# Altium PCB DC2342A-4-LAYOUT-ASCII.PcbDoc (part 2 of 2)
Units mm, origin at the board's own origin, x right, y up, seen from the top; angles counter-clockwise.
Board outline 88.9 x 88.9 mm, 4 copper layers (Comp Side, Layer 2, Layer 3, Solder Side), stack 0.831 mm thick; 86 components, 36 nets, 203 pads, 245 vias.
Unrouted connection lines stored in the file: 89.
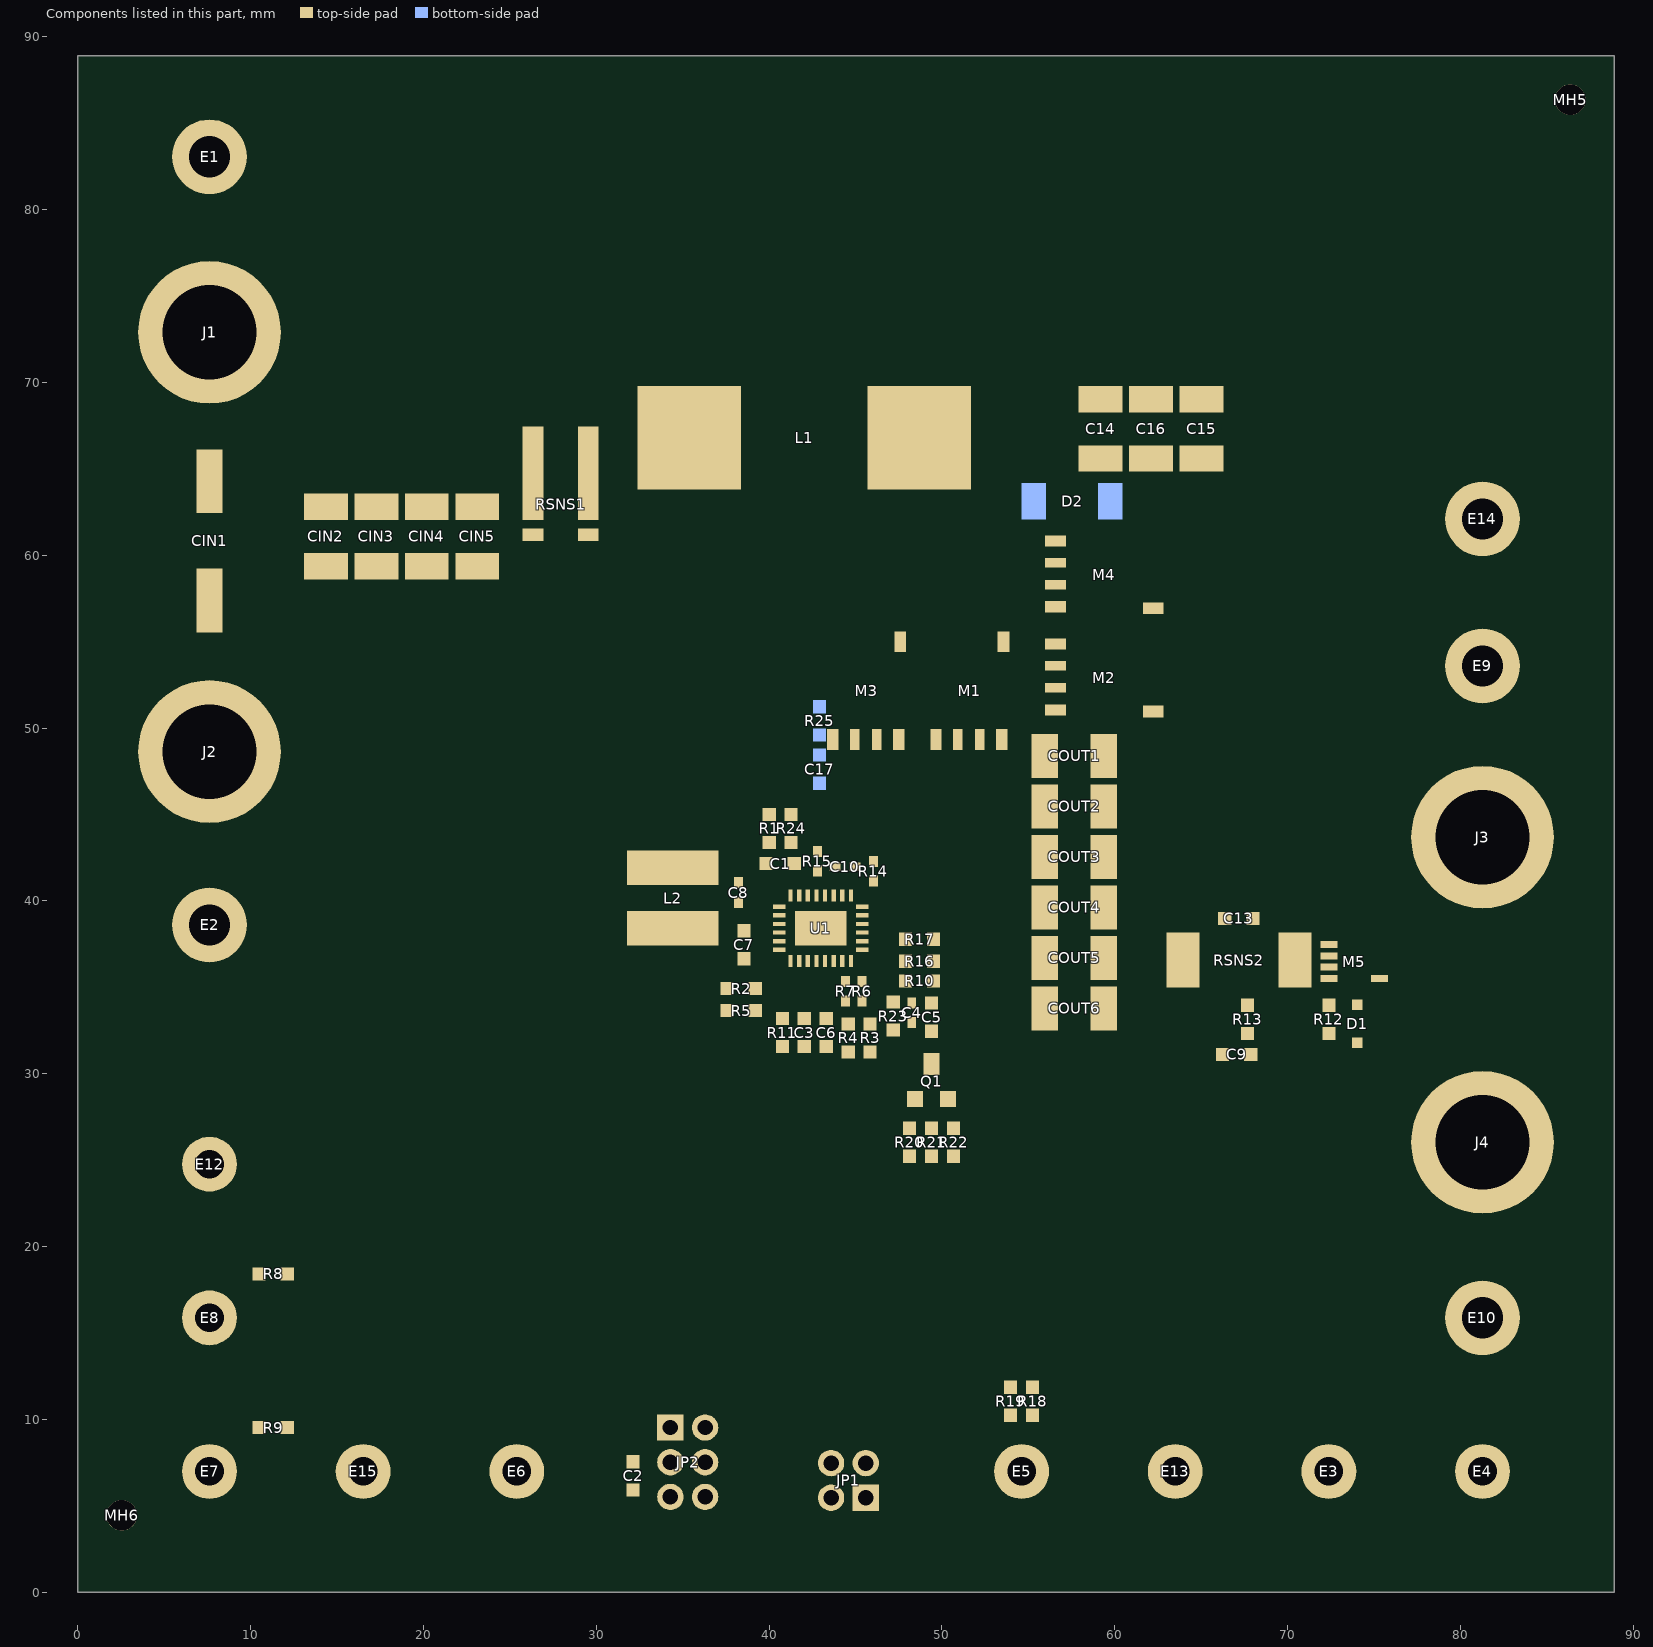
[diagram p4: the components of this part, seen from the top]

## Via types
v1: diameter 0.61, hole 0.254, Comp Side to Solder Side, 192 vias
v2: diameter 0.305, hole 0.152, Comp Side to Solder Side, 53 vias

## Nets (pads, with @x,y where several pads share a name; then routed paths per layer and width w, separated by ;. In a path a pad name is that pad's centre, name@x,y a point inside that pad or via, vN(x,y) a via of type N, cw(c..) or ccw(c..) an arc to the next point about the centre after c; other vN are vias at no path point) (continued)
copper on no net: | length 70.8
  Comp Side w0.127: 65.405,6.985 ccw(c63.5,6.985) 65.405,6.985
  Layer 3 w0.127: 32.58,5.08 ccw(c32.131,5.08) 32.58,5.08 ; 37.999,33.02 ccw(c37.592,33.02) 37.999,33.02 ; 42.444,30.988 ccw(c42.037,30.988) 42.444,30.988 ; 43.714,30.988 ccw(c43.307,30.988) 43.714,30.988 ; 49.175,32.956 ccw(c48.768,32.956) 49.175,32.956 ; 54.382,12.446 ccw(c53.975,12.446) 54.382,12.446 ; 65.434,6.985 ccw(c63.5,6.985) 65.434,6.985
  Solder Side w0.127: 32.557,5.08 ccw(c32.131,5.08) 32.557,5.08 ; 32.589,5.08 ccw(c32.131,5.08) 32.589,5.08 ; 38.018,33.02 ccw(c37.592,33.02) 38.018,33.02 ; 42.463,30.988 ccw(c42.037,30.988) 42.463,30.988 ; 43.733,30.988 ccw(c43.307,30.988) 43.733,30.988 ; 49.194,32.956 ccw(c48.768,32.956) 49.194,32.956 ; 54.401,12.446 ccw(c53.975,12.446) 54.401,12.446 ; 65.434,6.985 ccw(c63.5,6.985) 65.434,6.985

## Polygon pours and split planes (outlines as drawn)
N17513992 on Solder Side (solid, remove dead copper, pour order 71): 68.58,10.795 76.2,10.795 76.2,3.175 68.58,3.175
N17545932 on Solder Side (solid, remove dead copper, pour order 66): 42.291,66.675 57.658,66.675 57.658,50.292 42.291,50.292
EN/UVLO on Solder Side (solid, remove dead copper, pour order 61): 3.81,28.575 11.43,28.575 11.43,21.082 3.81,21.082
N17524747 on Solder Side (solid, remove dead copper, pour order 48): 3.81,19.685 11.43,19.685 11.43,12.065 3.81,12.065
PVIN on Solder Side (solid, remove dead copper, pour order 43): 27.813,60.96 1.27,60.96 1.27,87.63 27.813,87.63
N17541944 on Solder Side (solid, remove dead copper, pour order 38): 39.37,60.96 28.067,60.96 28.067,77.724 39.37,77.724
OUT on Solder Side (solid, remove dead copper, pour order 31): 57.912,50.292 72.898,50.292 72.898,66.675 57.912,66.675
N17516446 on Solder Side (solid, remove dead copper, pour order 30): 50.8,10.795 58.42,10.795 58.42,3.175 50.8,3.175
N17526210 on Solder Side (solid, remove dead copper, pour order 19): 3.81,10.795 11.43,10.795 11.43,3.175 3.81,3.175
N17514220 on Solder Side (solid, remove dead copper, pour order 17): 77.47,10.795 85.09,10.795 85.09,3.175 77.47,3.175
GND on Solder Side (solid, remove dead copper, pour order 10): 87.63,87.63 1.27,87.63 1.27,1.27 87.63,1.27
N17517750 on Solder Side (solid, remove dead copper, pour order 8): 21.59,10.795 29.21,10.795 29.21,3.175 21.59,3.175
N17821194 on Solder Side (solid, remove dead copper, pour order 0): 42.291,50.038 43.561,50.038 43.561,48.006 42.291,48.006
N17802509 on Comp Side (solid, remove dead copper, pour order 73): 25.527,61.658 27.813,61.658 27.813,60.833 25.527,60.833
N17513992 on Comp Side (solid, remove dead copper, pour order 72): 68.58,10.795 76.2,10.795 76.2,3.175 68.58,3.175
GND on Comp Side (solid, remove dead copper, pour order 70): 1.27,1.27 87.63,1.27 87.63,87.63 1.27,87.63
N17553131 on Comp Side (solid, remove dead copper, pour order 69): 45.657,43.561 46.482,43.561 46.482,41.974 45.657,41.974
N17514220 on Comp Side (solid, remove dead copper, pour order 68): 45.021,34.925 45.021,35.877 45.783,35.877 45.783,34.925
N17551482 on Comp Side (solid, remove dead copper, pour order 67): 43.37,42.291 44.291,42.291 44.291,41.021 43.37,41.021
PVIN on Comp Side (solid, remove dead copper, pour order 65): 41.974,40.767 41.783,40.767 40.703,41.846 40.703,43.434 41.084,43.815 41.974,43.815
N17573845 on Comp Side (solid, remove dead copper, pour order 64): 71.882,32.715 72.898,32.715 72.898,31.496 71.882,31.496
N17555485 on Comp Side (solid, remove dead copper, pour order 63): 50.038,29.845 50.038,31.623 48.768,31.623 48.768,29.845
N17513891 on Comp Side (solid, remove dead copper, pour order 62): 44.101,34.608 44.101,33.814 45.783,33.814 45.783,34.608
N17514220 on Comp Side (solid, remove dead copper, pour order 60): 77.47,10.795 85.09,10.795 85.09,3.175 77.47,3.175
PVIN on Comp Side (solid, remove dead copper, pour order 59): 46.291,31.813 45.371,31.813 45.371,30.543 46.291,30.543
N17545932 on Comp Side (solid, remove dead copper, pour order 58): 42.037,77.724 57.404,77.724 57.404,50.292 42.291,50.292 42.037,50.546
N17545932 on Comp Side (solid, remove dead copper, pour order 57): 44.514,43.561 45.402,43.561 45.402,41.021 44.514,41.021
N17514220 on Comp Side (solid, remove dead copper, pour order 56): 46.545,33.591 46.545,34.227 45.339,35.433 45.783,35.877 47.053,34.608 47.688,34.608 47.688,33.591
N17582960 on Comp Side (solid, remove dead copper, pour order 55): 37.968,39.543 37.968,40.027 39.955,40.027 40.32,39.662 40.32,39.543
N17573845 on Comp Side (solid, remove dead copper, pour order 54): 71.882,35.687 72.898,35.687 72.898,33.579 71.882,33.579
OUT on Comp Side (solid, remove dead copper, pour order 53): 48.863,36.989 50.228,36.989 50.228,36.005 48.863,36.005
PVIN on Comp Side (solid, remove dead copper, pour order 52): 38.735,45.466 38.735,44.577 40.45,44.577 40.45,45.466
PVIN on Comp Side (solid, remove dead copper, pour order 51): 41.846,43.815 39.56,43.815 39.56,42.926 41.846,42.926
N17570801 on Comp Side (solid, remove dead copper, pour order 50): 47.117,49.987 48.26,49.987 48.26,48.641 47.117,48.641
EN/UVLO on Comp Side (solid, remove dead copper, pour order 49): 38.672,33.084 38.672,35.496 39.688,35.496 39.688,33.084
OUT on Comp Side (solid, remove dead copper, pour order 47): 51.562,24.765 51.562,25.876 48.927,25.876 48.927,24.765
N17553131 on Comp Side (solid, remove dead copper, pour order 46): 55.899,50.292 55.899,51.435 57.245,51.435 57.245,50.292
PVIN on Comp Side (solid, remove dead copper, pour order 45): 48.609,24.765 48.609,25.876 47.117,25.876 47.117,24.765
N17581235 on Comp Side (solid, remove dead copper, pour order 44): 31.559,40.164 31.559,37.148 37.02,37.148 37.592,37.719 37.592,40.164
N17581448 on Comp Side (solid, remove dead copper, pour order 42): 37.084,43.18 31.559,43.18 31.559,40.322 40.291,40.322 40.529,40.084 41.402,40.084 41.402,40.64 40.608,41.434 37.529,41.434 37.529,42.735
INTVCC on Comp Side (solid, remove dead copper, pour order 41): 54.737,12.7 55.753,12.7 55.753,11.303 54.737,11.303
N176855280 on Comp Side (solid, remove dead copper, pour order 40): 49.53,29.019 51.149,29.019 51.149,26.194 50.197,26.194 50.197,27.94 49.53,27.94
N17516446 on Comp Side (solid, remove dead copper, pour order 37): 50.8,10.795 58.42,10.795 58.42,3.175 50.8,3.175
INTVCC on Comp Side (solid, remove dead copper, pour order 36): 39.497,38.746 37.823,38.746 37.823,37.784 39.497,37.784
N17575671 on Comp Side (solid, remove dead copper, pour order 35): 73.279,57.658 87.63,57.658 87.63,32.893 73.279,32.893
N17553131 on Comp Side (solid, remove dead copper, pour order 34): 55.899,56.261 55.899,57.404 57.245,57.404 57.245,56.261
N17513992 on Comp Side (solid, remove dead copper, pour order 33): 44.101,33.496 44.101,32.226 46.323,32.226 46.323,33.496
N17541944 on Comp Side (solid, remove dead copper, pour order 32): 28.067,77.724 41.783,77.724 41.783,56.515 30.734,56.515 30.734,61.912 28.067,61.912
N17530568 on Comp Side (solid, remove dead copper, pour order 29): 42.831,32.544 43.783,32.544 43.783,34.353 42.831,34.353
N17560526 on Comp Side (solid, remove dead copper, pour order 28): 67.31,39.751 73.025,39.751 73.025,35.941 71.628,35.941 71.628,34.671 67.31,34.671
EN/UVLO on Comp Side (solid, remove dead copper, pour order 27): 3.81,28.575 11.43,28.575 11.43,21.082 3.81,21.082
N17570801 on Comp Side (solid, remove dead copper, pour order 26): 52.768,49.987 53.848,49.987 53.848,48.641 52.768,48.641
OUT on Comp Side (solid, remove dead copper, pour order 25): 65.786,31.75 66.929,31.75 66.929,30.353 65.786,30.353
N17524747 on Comp Side (solid, remove dead copper, pour order 24): 3.81,19.685 11.43,19.685 11.43,12.065 3.81,12.065
PVIN on Comp Side (solid, remove dead copper, pour order 23): 1.27,60.833 25.273,60.833 25.273,61.912 27.813,61.912 27.813,77.978 57.658,77.978 57.658,67.437 66.802,67.437 66.802,87.63 1.27,87.63
PVIN on Comp Side (solid, remove dead copper, pour order 22): 36.703,35.401 38.227,35.401 38.227,34.48 36.703,34.48
N17802504 on Comp Side (solid, remove dead copper, pour order 21): 28.067,61.658 30.48,61.658 30.48,60.833 28.067,60.833
N178073360 on Comp Side (solid, remove dead copper, pour order 20): 48.959,35.877 48.959,33.591 50.102,33.591 50.102,35.877
INTVCC on Comp Side (solid, remove dead copper, pour order 18): 11.684,10.033 12.573,10.033 12.573,8.509 11.684,8.509
N17513992 on Comp Side (solid, remove dead copper, pour order 16): 44.101,34.925 44.101,35.877 44.767,35.877 44.767,34.925
N17517750 on Comp Side (solid, remove dead copper, pour order 15): 21.59,10.795 29.21,10.795 29.21,3.175 21.59,3.175
N17560526 on Comp Side (solid, remove dead copper, pour order 14): 67.31,32.766 68.326,32.766 68.326,30.353 67.31,30.353
N17786879 on Comp Side (solid, remove dead copper, pour order 13): 32.639,8.064 31.623,8.064 31.623,6.858 32.639,6.858
N17508735 on Comp Side (solid, remove dead copper, pour order 12): 40.291,32.544 41.243,32.544 41.243,34.353 40.291,34.353
SSFM on Comp Side (solid, remove dead copper, pour order 11): 41.561,32.544 42.513,32.544 42.513,34.353 41.561,34.353
N17528963 on Comp Side (solid, remove dead copper, pour order 9): 45.593,37.211 47.053,35.75 48.704,35.75 48.704,33.718 47.942,33.718 47.942,34.861 47.244,34.861 46.323,35.782 46.323,35.846 45.593,36.576
N17570801 on Comp Side (solid, remove dead copper, pour order 7): 42.418,43.561 44.196,43.561 44.196,42.672 43.18,42.672 43.18,42.481 42.418,42.481
INTVCC on Comp Side (solid, remove dead copper, pour order 6): 11.684,18.923 12.573,18.923 12.573,17.399 11.684,17.399
N17555485 on Comp Side (solid, remove dead copper, pour order 5): 47.561,38.1 48.273,38.1 48.273,36.068 47.276,36.068 47.276,36.02 45.91,37.386 45.91,37.782 47.561,37.782
OUT on Comp Side (solid, remove dead copper, pour order 4): 57.658,67.183 57.658,32.385 57.912,32.131 67.056,32.131 67.056,40.005 73.025,40.005 73.025,57.912 87.63,57.912 87.63,67.183
OUT on Comp Side (solid, remove dead copper, pour order 3): 40.831,45.466 40.831,44.45 42.545,44.45 42.545,45.466
N17687401 on Comp Side (solid, remove dead copper, pour order 2): 49.276,29.019 47.657,29.019 47.657,26.194 49.879,26.194 49.879,27.686 49.276,27.686
N17526210 on Comp Side (solid, remove dead copper, pour order 1): 3.81,10.795 11.43,10.795 11.43,3.175 3.81,3.175
GND on Layer 3 (solid, remove dead copper, pour order 39): 87.63,87.63 1.27,87.63 1.27,1.27 87.63,1.27
GND on Layer 2 (split plane): 87.565,12.319 72.771,12.319 46.609,38.481 44.958,38.481 44.958,38.354 46.482,38.354 72.644,12.192 87.565,12.192 87.565,1.335 1.335,1.335 1.335,30.988 33.401,30.988 40.894,38.481 40.894,38.608 40.767,38.608 33.337,31.178 1.335,31.178 1.335,87.565 87.565,87.565

## Keep-outs
Keep-Out Layer:
  the board outline again, w0.127

## Other copper
Comp Side:
  pour cut-out: 31.496,6.731 32.766,6.731 32.766,4.699 31.496,4.699 31.496,6.731
  pour cut-out: 42.545,8.636 46.736,8.636 46.736,4.445 42.545,4.445 42.545,8.636
  pour cut-out: 65.151,34.671 69.215,34.671 69.215,35.687 65.151,35.687 65.151,34.671
  pour cut-out: 68.199,33.591 68.199,35.687 66.421,35.687 66.421,32.258 66.929,32.258 66.929,33.591 68.199,33.591
  pour cut-out: 53.34,12.827 54.483,12.827 54.483,11.049 53.34,11.049 53.34,12.827
  pour cut-out: 41.212,37.592 41.656,37.592 41.656,37.148 41.212,37.148 41.212,37.592
  pour cut-out: 36.767,34.353 36.767,29.083 47.561,29.083 47.561,29.21 36.893,29.21 36.893,34.353 36.767,34.353
  pour cut-out: 45.783,39.306 51.371,39.306 51.371,28.003 51.244,28.003 51.244,39.179 45.783,39.179 45.783,39.306
  text "LAYER 1 - TOP LAYER" at 3.048,-5.334 h1.27
Layer 3:
  pour cut-out: 42.545,8.636 46.736,8.636 46.736,4.445 42.545,4.445 42.545,8.636
  text "LAYER 3 - GND PLANE 2" at 3.048,-5.334 h1.27
Solder Side:
  pour cut-out: 42.545,8.509 46.736,8.509 46.736,4.318 42.545,4.318 42.545,8.509
  text "REV 4" at 20.574,85.979 h1.14
  text "LAYER 4 - BOTTOM LAYER" at 3.048,-5.334 h1.27
Layer 2 (plane layer: these items are gaps in the copper):
  region: 88.9,0 0,0 0,88.9 88.9,88.9 hole: 87.63,87.63 1.27,87.63 1.27,1.27 87.63,1.27
  pour cut-out: 0.127,31.178 33.337,31.178 40.767,38.608 40.894,38.608 40.894,38.481 33.401,30.988 0.127,30.988 0.127,31.178
  pour cut-out: 44.958,38.481 46.609,38.481 46.609,38.354 44.958,38.354 44.958,38.481
  pour cut-out: 88.646,12.319 72.771,12.319 46.609,38.481 46.355,38.481 72.644,12.192 88.646,12.192 88.646,12.319
  lines w0.127: 1.27,1.27 87.63,1.27 87.63,87.63 1.27,87.63 1.27,1.27
  text "LAYER 2 - GND PLANE 1" at 3.048,-5.334 h1.27

## Silkscreen, mask and mechanical layers (free items; w line width, h text height)
SilkBottom:
  text "FOR CUSTOMER USE ONLY" at 52.88,86.03 h1.14
PMask Bottom:
  text "BOTTOM SOLDER PASTE" at 3.048,-5.334 h1.27
SMask Bottom:
  text "BOTTOM SOLDER MASK" at 3.048,-5.334 h1.27
Assembly Bottom:
  drawing of 31 lines, arcs and shapes, not listed
  text "1630 MCCARTHY BLVD" at -44.418,6.572 h0.89
  text "MILPITAS, CA 95035" at -44.418,4.794 h0.89
  text "PH: (408)432-1900" at -44.418,3.016 h0.89
  text "www.linear.com" at -44.418,1.238 h1.02
  text "LTC CONFIDENTIAL-" at -44.418,-0.54 h0.89
  text "TECHNOLOGY" at -23.462,-1.771 h1.84
  text "FOR CUSTOMER USE ONLY" at -44.418,-2.318 h0.89
  text "--------------------------------" at -4.127,-4 h1.4
  text "BOTTOM ASSEMBLY DRAWING" at -12.668,-5.747 h1.27
  text "TITLE:" at -5.683,-5.747 h1.27
  text "60V SYNCHRONOUS BOOST LED CONTROLLER" at -7.62,-11.684 h1.4
  text "REV" at -59.023,-17.812 h1.27
  text "IC NO." at -13.303,-17.812 h1.27
  text "SIZE" at -5.937,-17.812 h1.27
  text "LT3762EUFD" at -27.273,-18.606 h1.52
  text "BOTTOM COMPONENTS OPT" at 66.929,-19.05 h1.4
  text "4" at -60.928,-21.622 h1.65
  text "N/A" at -5.683,-21.622 h1.65
  text "DC2342A" at -29.495,-21.812 h1.52
  text "SHT 2 of 2" at -50.133,-25.432 h1.27
  text "DC2342A-4.PCB" at -18.542,-25.432 h1.27
  text "FILENAME:" at -5.683,-25.432 h1.27
Layer_14:
  drawing of 178 lines, arcs and shapes, not listed
  text "I" at -8.128,80.01 h1.27 r180
  text "IN" at -7.493,78.232 h0.89
  text "-" at -2.286,75.438 h1.59 r180
  text "+" at -12.065,73.66 h1.59
  text "A" at -6.731,72.072 h1.59
  text "V" at 95.758,66.421 h1.27
  text "OUT" at 97.028,66.421 h0.89
  text "+" at -22.987,66.04 h1.59 r180
  text "+" at -11.938,63.373 h1.59
  text "+" at 94.234,63.119 h1.59
  text "-" at 102.235,63.119 h1.59
  text "V" at 96.965,61.023 h1.59
  text "V" at -27.686,60.325 h1.27
  text "IN" at -26.416,60.325 h0.89
  text "V" at -22.225,59.944 h1.59
  text "-" at -12.065,57.15 h1.59
  text "-" at -24.384,56.388 h1.59
  text "I" at 95.885,50.673 h1.27 r180
  text "LED" at 96.52,48.895 h0.89
  text "-" at 101.727,46.101 h1.59 r180
  text "+" at 92.075,44.323 h1.59
  text "A" at 97.282,42.735 h1.59
  text "+" at 117.475,36.322 h1.59 r180
  text "OPTIONAL" at -15.113,32.512 h1.02
  text "10 LEDS" at 94.615,31.369 h1.02
  text "FOR SHUTDOWN" at -15.113,30.48 h1.02
  text "V" at 119.634,30.385 h1.27
  text "LED" at 121.158,30.385 h0.89
  text "V" at 115.443,30.131 h1.59
  text "2A" at 96.901,29.083 h1.02
  text "-" at 118.872,26.67 h1.59
  text "-" at -13.081,16.891 h1.59
  text "+" at -5.08,16.891 h1.59
  text "V" at -7.81,14.795 h1.59
  text "-" at -13.081,8.001 h1.59
  text "+" at -5.08,8.001 h1.59
  text "V" at -7.81,5.905 h1.59
  text "3V" at 53.086,-5.461 h1.02
  text "2V" at 77.216,-5.461 h1.02
  text "2V" at 90.043,-5.461 h1.02
  text "OPTIONAL FOR" at 32.195,-8.954 h1.02
  text "OPTIONAL FOR" at 2.413,-9.144 h1.02
  text "OPTIONAL FOR" at 94.234,-10.795 h1.02
  text "INTERNAL" at 32.195,-10.986 h1.02
  text "EXTERNAL" at 2.54,-11.049 h1.02
  text "0V" at 45.593,-12.827 h1.02
  text "0V" at 69.723,-12.827 h1.02
  text "0V" at 82.55,-12.827 h1.02
  text "ANALOG DIMMING" at 94.234,-12.827 h1.02
  text "PWM DIMMING" at 32.195,-13.018 h1.02
  text "PWM DIMMING" at 2.54,-13.081 h1.02
Layer_15:
  lines w1.27: 34.163,5.461 36.195,5.461 ; 43.561,7.493 45.593,7.493
Layer_18:
  text "TOP SILKSCREEN" at 3.048,-5.334 h1.27
Drill Drawing:
  drawing of 824 lines, arcs and shapes, not listed
  text "3.50\"" at -8.255,88.265 h1.27
  text "LAYER STRUCTURE" at 134.525,84.01 h2.16
  text ".0028\"" at 131.185,76.517 h1.27
  text "MICROSTRIP" at 168.116,76.517 h1.27
  text ".0035\"" at 131.185,72.707 h1.27
  text "PREPREG" at 168.116,72.707 h1.27
  text ".0014\"" at 131.185,68.897 h1.27
  text "STRIP LINE" at 168.116,68.897 h1.27
  text ".062\"" at 120.39,66.992 h1.27
  text "CORE MATERIAL" at 168.116,65.087 h1.27
  text "4 LAYERS" at 117.215,63.817 h1.27
  text ".0014\"" at 131.185,61.277 h1.27
  text "STRIP LINE" at 168.116,61.277 h1.27
  text ".0035\"" at 131.185,57.468 h1.27
  text "PREPREG" at 168.116,57.468 h1.27
  text ".0028\"" at 131.185,53.657 h1.27
  text "MICROSTRIP" at 168.116,53.657 h1.27
  text "NOTES: UNLESS OTHERWISE SPECIFIED" at 118.046,43.942 h2.16
  text "1. FAB PER IPC-A-600." at 118.681,38.227 h1.27
  text "2. MATERIAL: -EPOXY FIBERGLASS, NEMA GRADE FR-4" at 118.046,34.417 h1.27
  text "-FINISHED THICKNESS TO BE 0.062\" +/- .005\"" at 133.286,31.242 h1.27
  text "-TOTAL OF 4 LAYERS WITH 2 OZ. CU ON THE OUTER LAYERS" at 133.286,28.067 h1.27
  text "AND 1 OZ. CU ON THE INNER LAYERS." at 135.064,24.892 h1.27
  text "-FLAMMABILITY RATING: 94 V-O MINIMUM." at 133.286,21.717 h1.27
  text "3. SIZE: CUT TO DIMENSIONS AND TOLERANCES SHOWN." at 118.063,17.625 h1.27
  text "0.00\" ARE PRIMARY DATUMS." at 127.572,14.732 h1.27
  text "4. DRILLING: -DRILL HOLES PER SCHEDULE. PLATE THROUGH" at 118.063,10.259 h1.27
  text "HOLES WITH COPPER, 0.001\" THICK MIN." at 133.794,7.112 h1.27
  text "-ALL HOLE SIZES ARE SPECIFIED AFTER PLATING." at 132.27,3.937 h1.27
  text "-HOLE LOCATION TOLERANCES ARE +/-0.003\"" at 132.27,0.635 h1.27
  text "0.00\"" at -8.255,-0.635 h1.27
  text "IN RELATION TO CENTER" at 133.794,-2.159 h1.27
  text "0.00\"" at 0.635,-8.89 h1.27 r90
  text "3.50\"" at 89.535,-9.017 h1.27 r90
  text "5. FINISH: -SMOBC USING LPI BOTH SIDES, COLOR GLOSS GREEN." at 118.046,-10.668 h1.27
  text "-GOLD IMMERSION BOTH SIDES." at 129.794,-15.113 h1.27
  text "(LEAD FREE SOLDER CAN BE USED FOR PROTOTYPE)" at 131.572,-18.288 h1.27
  text "-FOR SILKSCREEN: BOTH SIDES USE WHITE NON-CONDUCTIVE INK." at 129.794,-21.336 h1.27
  text "6. DO NOT ALTER ARTWORK e.g. TO ADD LOGO OR DATE CODE." at 118.364,-25.4 h1.27
  text "PAD SIZE CAN BE MODIFIED TO MEET END FINISH." at 121.412,-28.448 h1.27
  text "7. PCBS ARE TO BE RoHS COMPLIANT." at 118.364,-32.258 h1.27
  text "8. SCORING FOR PANELIZED PCB:" at 118.364,-36.195 h1.27
  text ".020" at 153.316,-41.175 h1.27
  text "x" at 130.774,-44.985 h1.02
  text "x" at 131.726,-44.985 h1.02
  text "x" at 132.679,-44.985 h1.02
  text "x" at 133.631,-44.985 h1.02
  text "x" at 134.584,-44.985 h1.02
  text "x" at 135.536,-44.985 h1.02
  text "x" at 136.489,-44.985 h1.02
  text "x" at 137.441,-44.985 h1.02
  text "x" at 138.394,-44.985 h1.02
  text "x" at 139.346,-44.985 h1.02
  text "x" at 140.299,-44.985 h1.02
  text "x" at 141.251,-44.985 h1.02
  text "x" at 142.204,-44.985 h1.02
  text "x" at 143.156,-44.985 h1.02
  text "x" at 144.109,-44.985 h0.64
  text "x" at 130.774,-47.525 h1.02
  text "x" at 131.726,-47.525 h1.02
  text "x" at 132.679,-47.525 h1.02
  text "x" at 133.631,-47.525 h1.02
  text "x" at 134.584,-47.525 h1.02
  text "x" at 135.536,-47.525 h1.02
  text "x" at 136.489,-47.525 h1.02
  text "x" at 137.441,-47.525 h1.02
  text "x" at 138.394,-47.525 h1.02
  text "x" at 139.346,-47.525 h1.02
  text "x" at 140.299,-47.525 h1.02
  text "x" at 141.251,-47.525 h1.02
  text "x" at 142.204,-47.525 h1.02
  text "x" at 143.156,-47.525 h1.02
  text "x" at 144.109,-47.525 h0.64
  text ".017" at 129.504,-50.461 h1.27
  text "1630 MCCARTHY BLVD" at 187.928,-59.023 h0.89
  text "UNLESS OTHERWISE SPECIFIED" at 121.507,-59.531 h1.02
  text "MILPITAS, CA 95035" at 187.928,-60.801 h0.89
  text "ADDITIONAL REQUREMENT FOR PROTOTYPE FAB ONLY:" at -3.842,-61.468 h1.27
  text "PH: (408)432-1900" at 187.928,-62.579 h0.89
  text "DIMENSIONS ARE IN INCHES" at 122.015,-63.087 h1.02
  text "www.linear.com" at 187.928,-64.611 h1.14
  text "TOLERANCES:" at 122.015,-65.754 h1.02
  text "1. OUTGOING INSPECTION REPORT (BASED ON ACTUAL MEASUREMENTS AND CROSS SECTION)." at -2.572,-65.913 h1.27
  text "LTC CONFIDENTIAL-" at 187.928,-66.389 h0.89
  text "TECHNOLOGY" at 167.037,-67.215 h1.84
  text "+" at 134.969,-67.659 h0.76
  text "FOR CUSTOMER USE ONLY" at 187.928,-68.167 h0.89
  text "0.XX\" =  0.01\"" at 127.349,-68.421 h1.02
  text "-" at 134.969,-68.675 h0.76
  text "+" at 134.969,-70.453 h0.76
  text "0.XXX\" =  0.005\"" at 126.333,-70.961 h1.02
  text "ADDITIONAL REQUREMENTS FOR PRODUCTION FAB ONLY:" at -3.842,-70.993 h1.27
  text "-" at 134.969,-71.469 h0.76
  text "TITLE:" at 148.558,-71.469 h1.27
  text "FABRICATION DRAWING" at 156.178,-71.469 h1.27
  text "INTERPRET DIM AND TOL" at 122.015,-74.009 h1.02
  text "1. PROVIDE COMPLIANCE CERTIFICATES FOR RoHS, REACH AND CONFLICT-FREE MINERALS." at -2.572,-75.438 h1.27
  text "PER ASME Y14.5M-1994" at 122.015,-76.549 h1.02
  text "60V SYNCHRONOUS BOOST LED CONTROLLER" at 149.479,-77.216 h1.52
  text "---" at 209.01,-78.073 h1.27 r90
  text "2. SOLDERABILITY BOARD WITH TEST RESULTS." at -2.572,-78.613 h1.27
  text "THIRD ANGLE PROJECTION" at 121.761,-79.089 h1.02
  text "3. OUTGOING INSPECTION REPORT (BASED ON ACTUAL MEASUREMENTS AND CROSS SECTION)." at -2.572,-81.788 h1.27
  text "SIZE" at 149.574,-82.899 h1.27
  text "IC NO." at 156.813,-82.899 h1.27
  text "REV" at 202.533,-82.899 h1.27
  text "LT3762EUFD" at 172.434,-83.534 h1.91
  text "4. VACUUM PACKED WITH DESICCANT." at -2.572,-84.963 h1.27
  text "4" at 203.994,-86.519 h1.65
  text "N/A" at 149.193,-86.709 h1.65
  text "DC2342A" at 175.419,-87.154 h1.78
  text "5. FULL PANEL WITH NO REJECT" at -2.572,-88.138 h1.27
  text "FILENAME:" at 149.066,-90.773 h1.27
  text "DC2342A-4.PCB" at 163.036,-90.773 h1.27
  text "SHT 1 OF 1" at 194.278,-90.773 h1.27
Layer_19:
  text "BOTTOM SILKSCREEN" at 3.048,-5.334 h1.27
Layer_20:
  text "LINEAR TECHNOLOGY" at 3.048,-8.509 h1.27
  text "DATE:" at 33.909,-8.509 h1.27
  text "1-29-18" at 41.529,-8.509 h1.27
  text "DC2342A-4, LT3762EUFD" at 3.048,-11.684 h1.27
SMask Top:
  region: 28.931,62.166 30.15,62.166 30.15,61.404 28.931,61.404 28.931,62.166
  region: 25.73,62.166 26.949,62.166 26.949,61.404 25.73,61.404 25.73,62.166
  text "TOP SOLDER MASK" at 3.048,-5.334 h1.27
PMask Top:
  region: 28.943,61.214 30.137,61.214 30.137,61.658 28.943,61.658 28.943,61.214
  region: 25.743,61.214 26.937,61.214 26.937,61.658 25.743,61.658 25.743,61.214
  text "TOP SOLDER PASTE" at 3.048,-5.334 h1.27
Silkscreen Top:
  drawing of 882 lines, arcs and shapes, not listed
  text "LT3762" at 40.226,84.963 h1.78
  text "60V SYNCHRONOUS BOOST LED CONTROLLER" at 18.523,81.915 h1.65
  text "DC2342A" at 39.325,78.867 h1.65
  text "ANALOG" at 22.2,26.746 h3.3
  text "DEVICES" at 21.946,24.079 h3.3
  text "P" at 22.771,21.381 h0.76
  text "O" at 24.067,21.381 h0.76
  text "W" at 25.579,21.381 h0.76
  text "E" at 27.308,21.381 h0.76
  text "R" at 28.604,21.381 h0.76
  text "B" at 30.44,21.381 h0.76
  text "Y" at 31.736,21.381 h0.76
  text "TM" at 32.708,17.816 h0.54
  text "cm" at 39.053,17.145 h1.02
  text "1" at 46.673,17.145 h1.02
  text "www.linear.com/3762" at 18.234,15.98 h0.87
  text "(408) 432-1900" at 19.747,13.928 h0.87
Assembly Top:
  drawing of 306 lines, arcs and shapes, not listed
  text "NOTES: UNLESS OTHERWISE SPECIFIED" at 99.568,84.201 h2.03
  text "1. WORKMANSHIP SHALL BE IN ACCORDANCE WITH IPC-A-610." at 96.393,79.756 h1.27
  text "MAXIMUM SOLDER TEMPERATURE IS 240 DEG C." at 98.933,76.581 h1.27
  text "2. ASSEMBLY PROCESS SHALL INCLUDE: REFLOW SOLDER TOP SIDE SMD." at 96.393,73.406 h1.27
  text "3. PARTS TO OMIT WILL BE SPECIFIED ON THE BILL OF MATERIALS." at 96.393,69.596 h1.27
  text "LOCATIONS OF OMITTED PARTS SHALL BE FREE OF SOLDER." at 99.568,67.056 h1.27
  text "MASK THE SOLDER STENCIL WHERE SMT PARTS ARE OMITTED." at 99.568,64.516 h1.27
  text "4. INSTALL SHUNTS AS SHOWN ON ASSY DRAWING." at 96.393,60.706 h1.27
  text "DEPANELIZE BOARDS AFTER ASSEMBLY AND ROUTE-OUT THE" at 99.568,56.896 h1.27
  text "5." at 96.361,56.832 h1.27
  text "BREAKOUT TABS ON FOUR SIDES OF THE BOARD EDGE." at 99.568,54.356 h1.27
  text "DO NOT APPLY ANY KIND OF ASSEMBLY STAMP OR QA STAMP" at 99.568,50.546 h1.27
  text "6." at 96.361,50.165 h1.27
  text "TO ANY BOARD." at 99.568,48.006 h1.27
  text "INSTALL 4 STANDOFFS AT 4 LOCATIONS AS SHOWN BELOW:" at 99.568,44.196 h1.27
  text "7." at 96.361,43.815 h1.27
  text "TURRETS" at 113.538,36.576 h1.27
  text "PCB : TOP" at 113.728,30.353 h1.27
  text "PCB : BOTTOM" at 110.553,14.478 h1.27
  text "1630 MCCARTHY BLVD" at 158.623,3.937 h0.89
  text "MILPITAS, CA 95035" at 158.623,2.159 h0.89
  text "PH: (408)432-1900" at 158.623,0.381 h0.89
  text "www.linear.com" at 158.623,-1.651 h1.14
  text "LTC CONFIDENTIAL-" at 158.623,-3.429 h0.89
  text "TECHNOLOGY" at 136.843,-4.508 h1.84
  text "FOR CUSTOMER USE ONLY" at 158.623,-5.207 h0.89
  text "TITLE:" at 119.761,-8.509 h1.27
  text "TOP ASSEMBLY DRAWING" at 127.381,-8.509 h1.27
  text "60V SYNCHRONOUS BOOST LED CONTROLLER" at 120.333,-14.796 h1.52
  text ".." at 178.88,-16.066 h1.27 r90
  text "SIZE" at 119.761,-19.939 h1.27
  text "IC NO." at 128.016,-19.939 h1.27
  text "REV." at 173.101,-19.939 h1.27
  text "LT3762EUFD" at 143.637,-20.574 h1.91
  text "N/A" at 120.269,-23.495 h1.52
  text "DC2342A" at 146.876,-23.94 h1.78
  text "4" at 174.435,-23.94 h1.65
  text "FILENAME:" at 119.761,-27.559 h1.27
  text "SHT 1 OF 2" at 164.846,-27.559 h1.27
  text "DC2342A-4.PCB" at 134.493,-27.75 h1.27